# Altium PCB TestAdapterBoard_01.PcbDoc
Units mm, origin at the board's own origin, x right, y up, seen from the top; angles counter-clockwise.
Board outline 57.5 x 55 mm, 2 copper layers (Top Layer, Bottom Layer), stack 1.036 mm thick; 17 components, 16 nets, 110 pads, 93 vias.
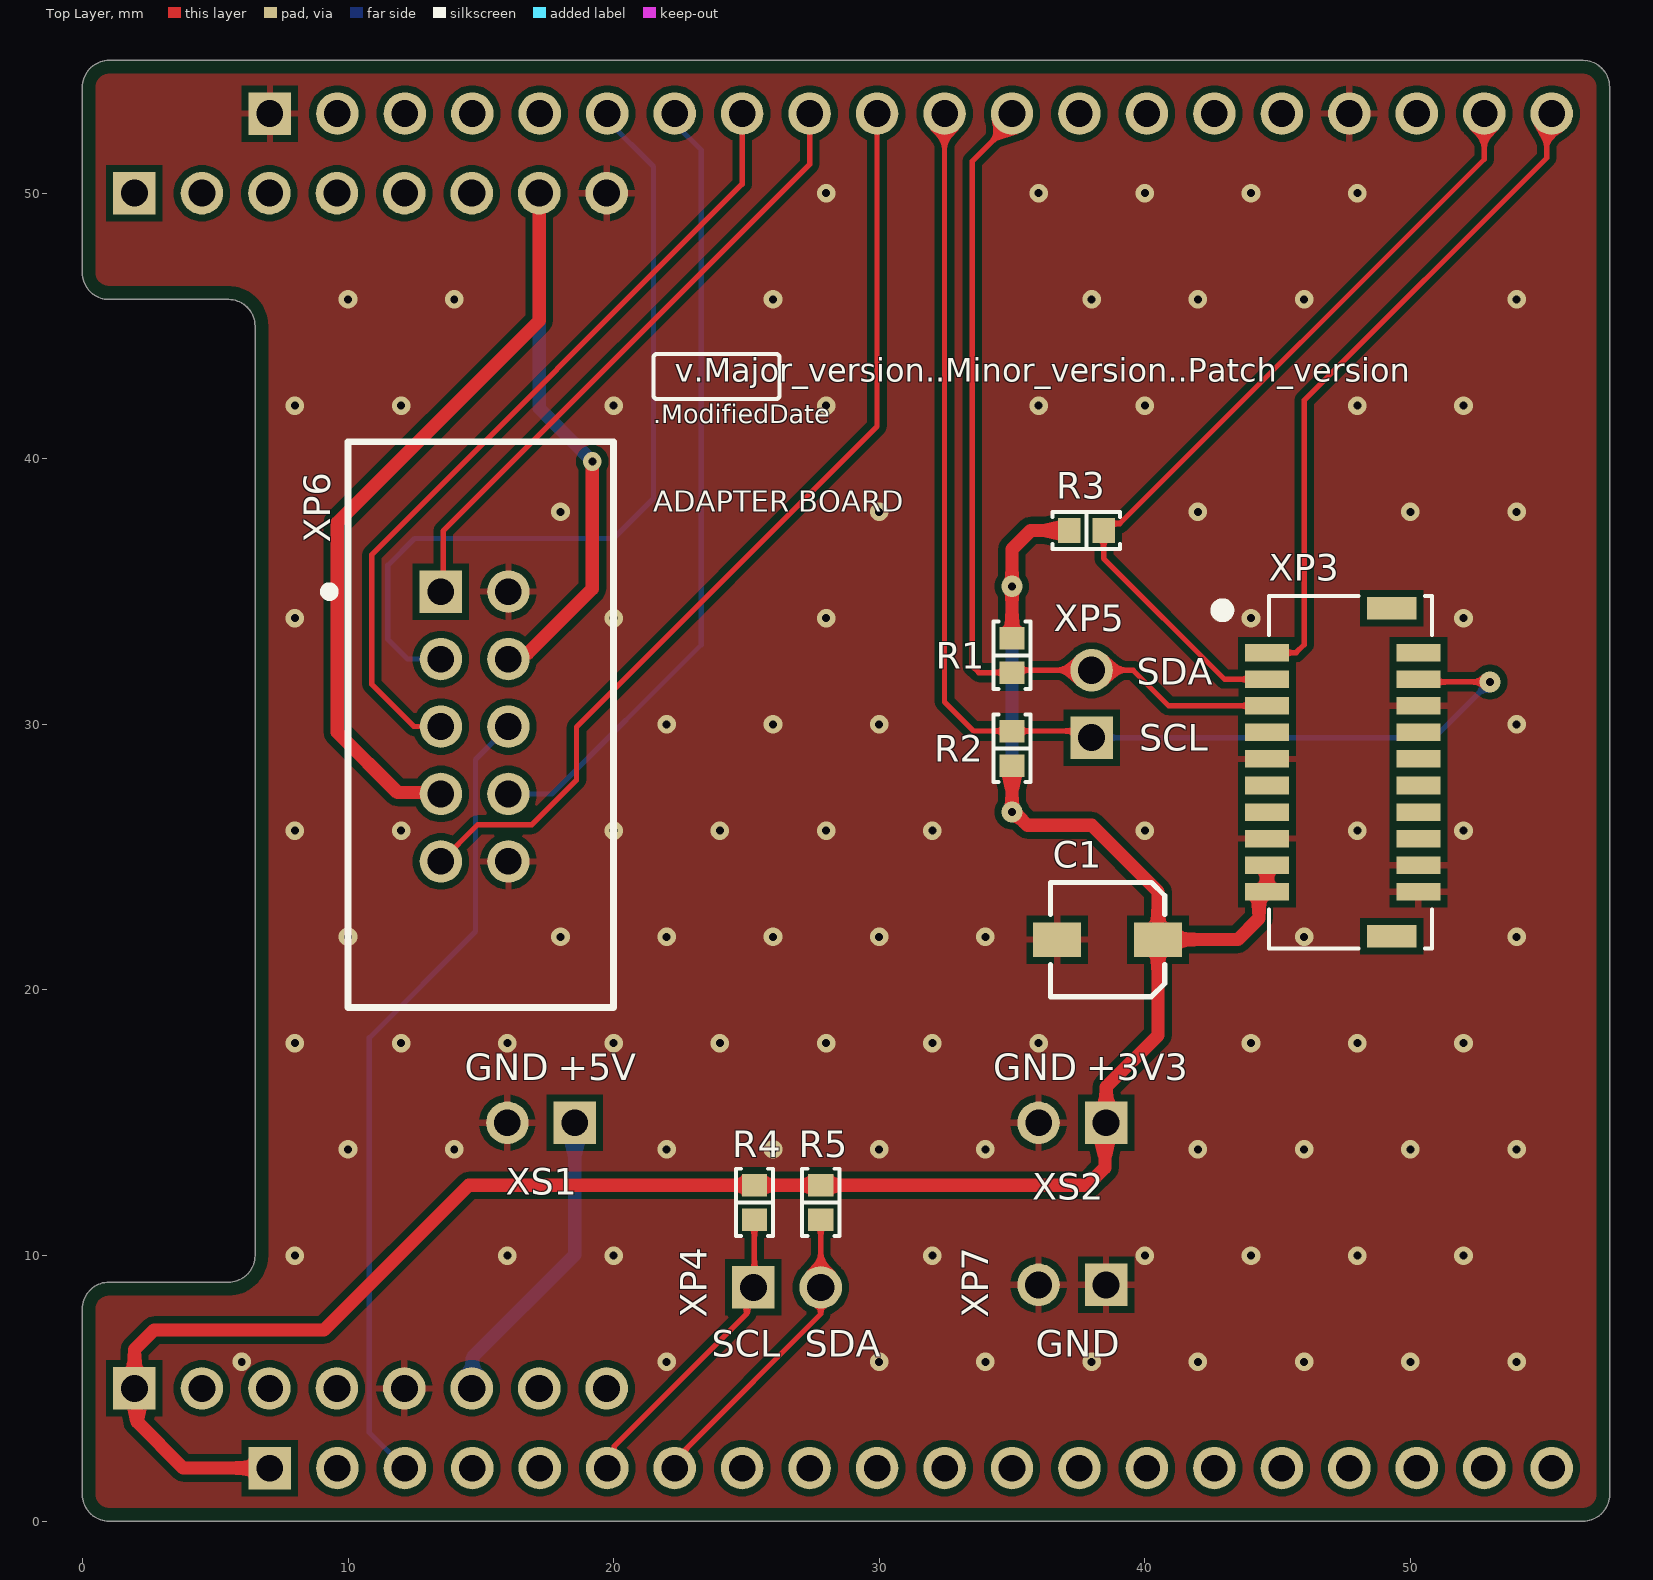
[diagram p0: Top Layer view]
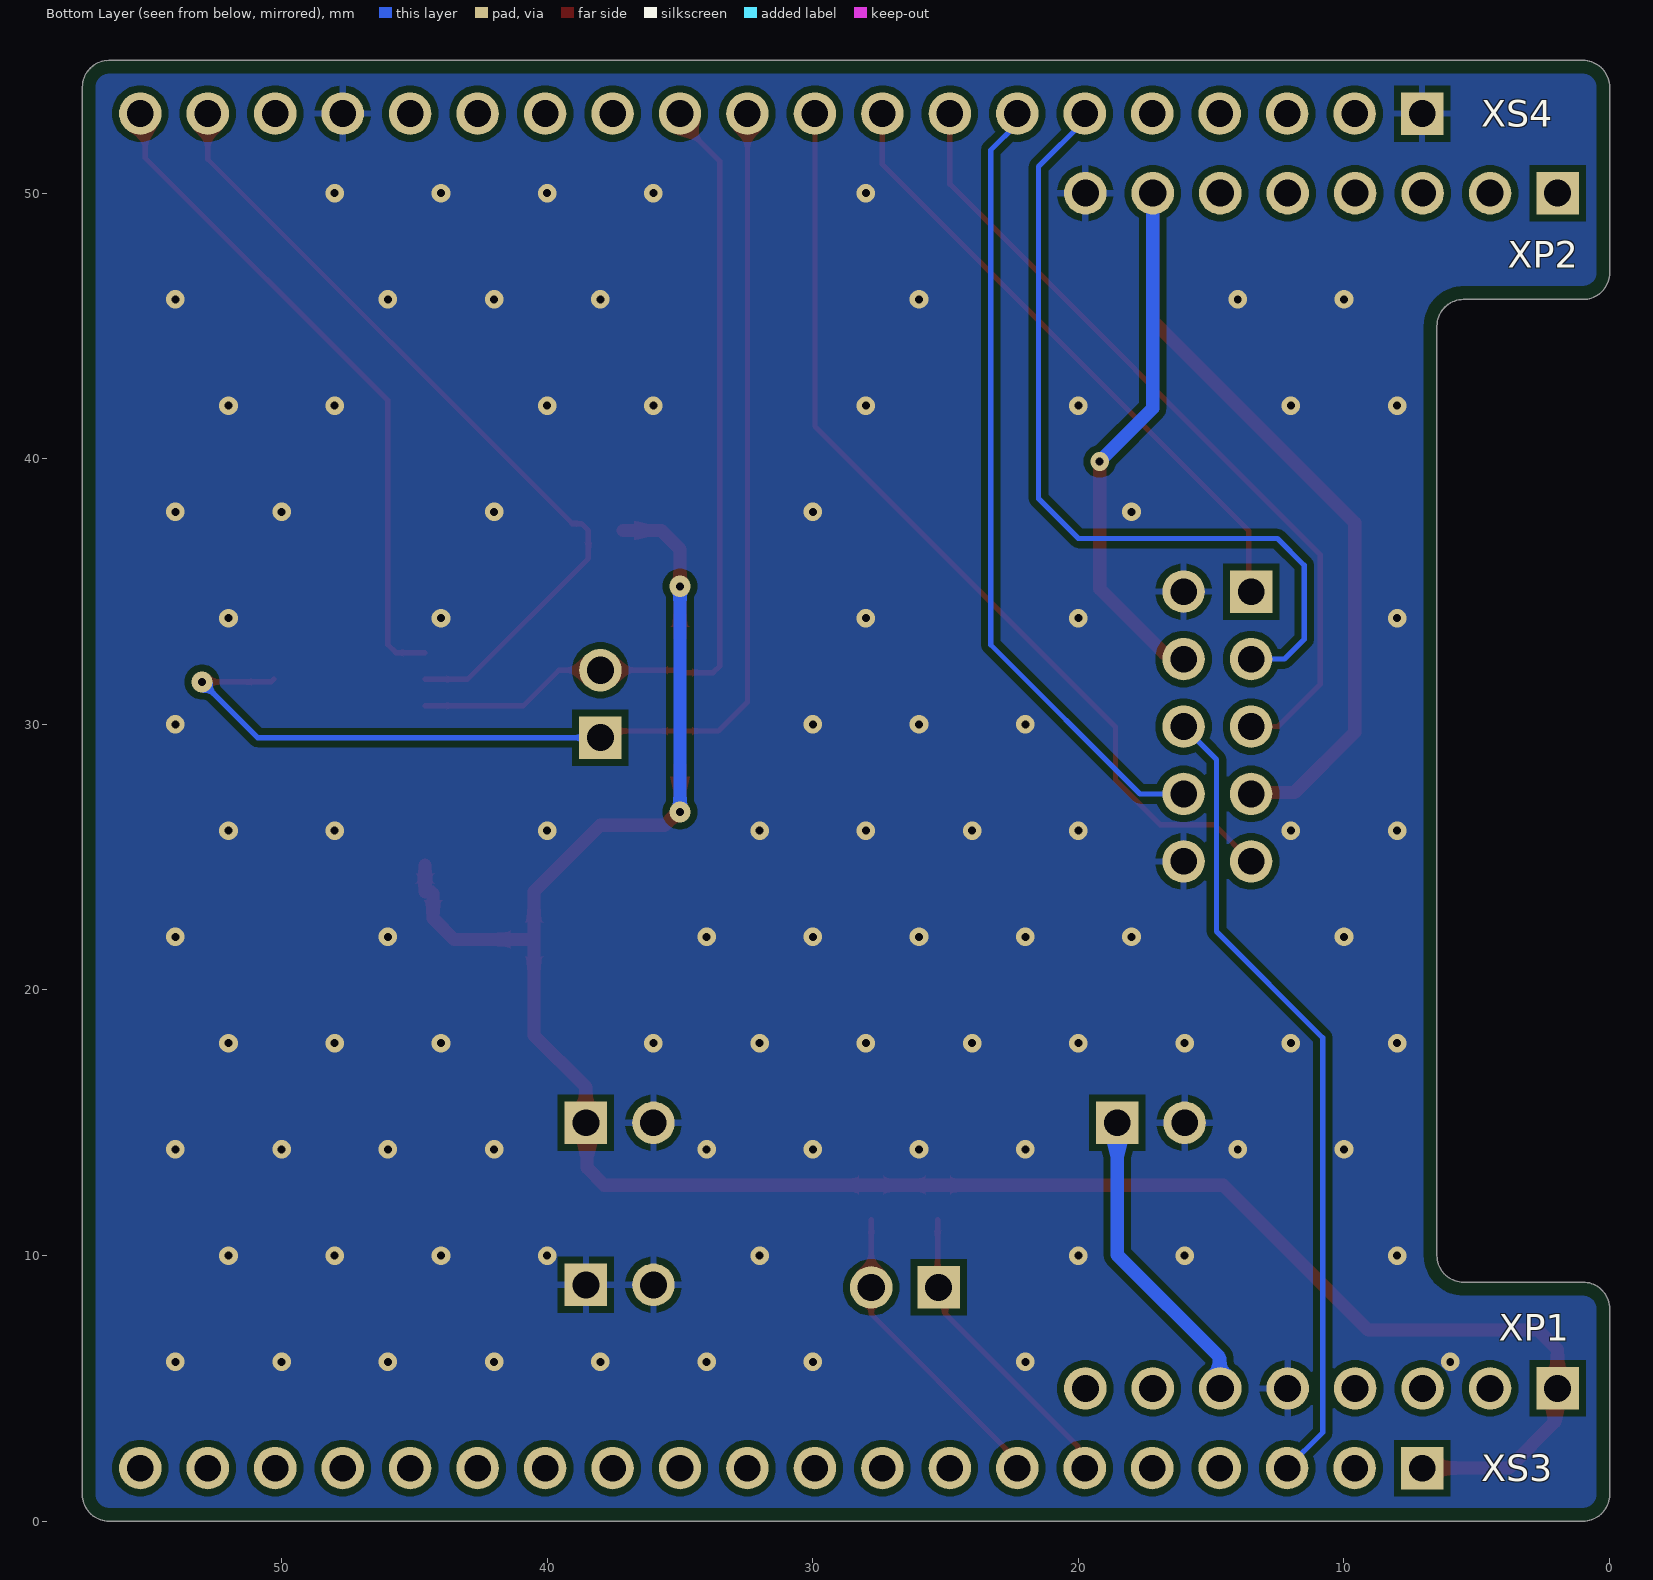
[diagram p1: Bottom Layer view, seen from below]
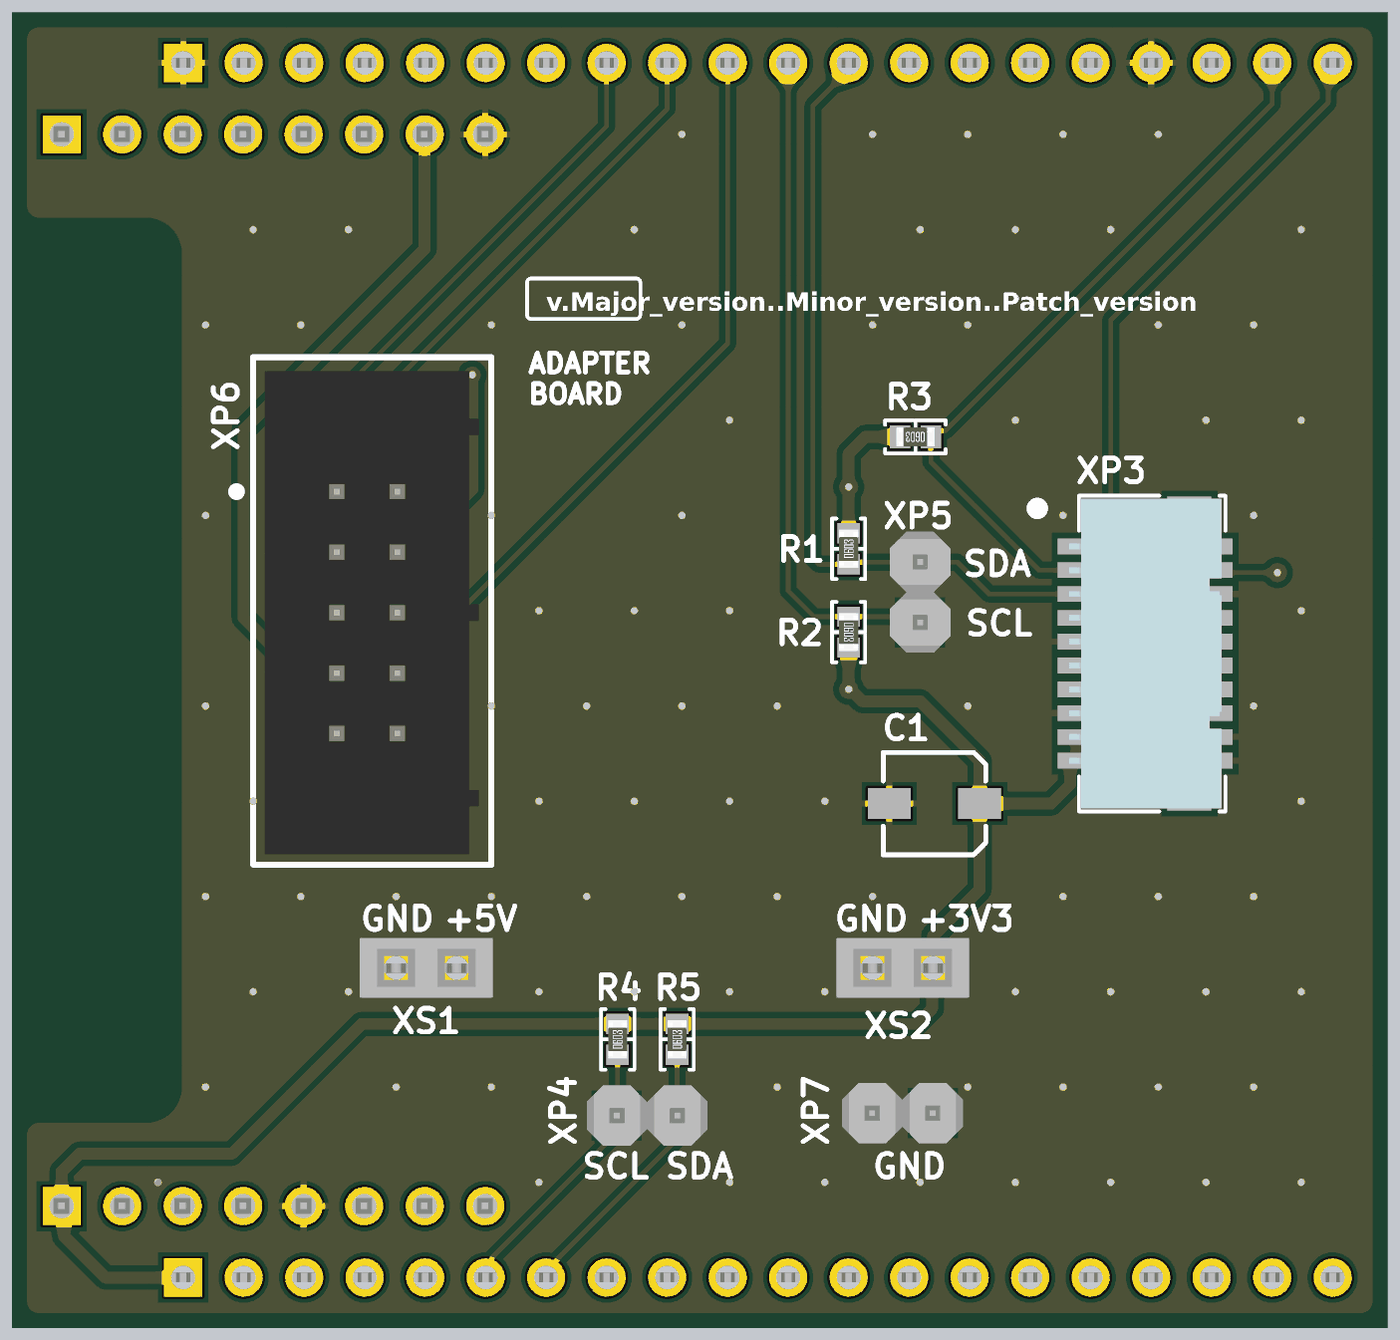
[diagram p2: 3D render of the assembled board from above, using the file's embedded part models]
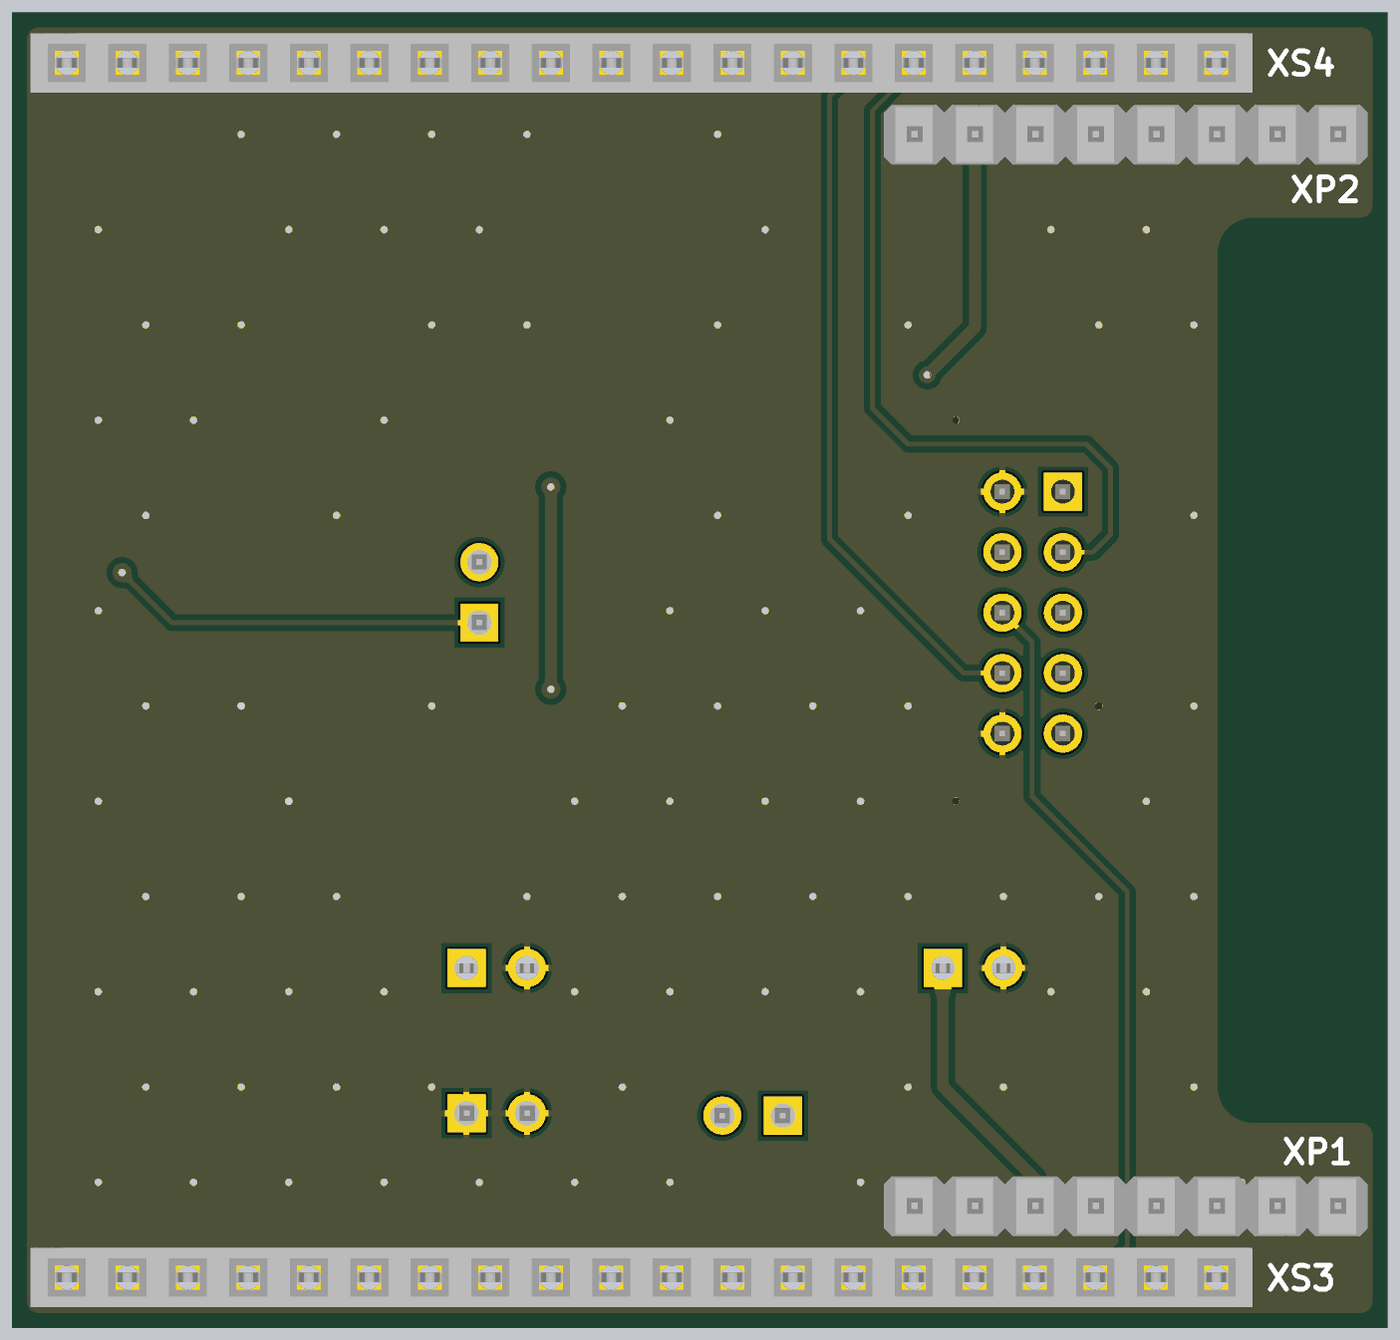
[diagram p3: 3D render of the assembled board from below, using the file's embedded part models]

## Layer stack, top to bottom
Top Solder: solder mask 0.0102, Solder Resist, Dk 3.5
Top Layer: signal copper 0.018
Dielectric 1: core 1, FR4, Dk 4.6
Bottom Layer: signal copper 0.018
Bottom Solder: solder mask 0.0102, Solder Resist, Dk 3.5

## Board outline
0,1 ccw(c1,1) 1,0 56.5,0 ccw(c56.5,1) 57.5,1 57.5,54 ccw(c56.5,54) 56.5,55 1,55 ccw(c1,54) 0,54 0,47 ccw(c1,47) 1,46 5.5,46 cw(c5.5,45) 6.5,45 6.5,10 cw(c5.5,10) 5.5,9 1,9 ccw(c1,8) 0,8

## Design rules (kind name [scope] priority, off if disabled: settings)
BoardOutlineClearance [All] p1: gap=0.5 ignorepadtopadclearanceinfootprint=FALSE
Clearance [All] p1: gap=0.254 ignorepadtopadclearanceinfootprint=FALSE
HoleSize [All] p1: absolutevalues=TRUE maxlimit=5 minlimit=0.2 maxpercent=80.000 minpercent=20.000
MinimumAnnularRing [All] p1: minimumring=0.2
MinimumSolderMaskSliver [All] p1: minsoldermaskwidth=0.15
PolygonConnect [All] p1: thpad.connectstyle=Relief thpad.reliefconductorwidth=0.254 thpad.reliefentries=4 thpad.polygonreliefangle="90 Angle" thpad.airgapwidth=0.254 smdpad.connectstyle=Relief smdpad.reliefconductorwidth=0.254 smdpad.reliefentries=4 smdpad.polygonreliefangle="90 Angle" smdpad.airgapwidth=0.254 via.connectstyle=Direct via.reliefconductorwidth=0.254 via.reliefentries=4 via.polygonreliefangle="90 Angle" via.airgapwidth=0.254
RoutingVias [All] p1: holewidth=0.3 width=0.7 viastyle="Through Hole" minholewidth=0.2 minwidth=0.4 maxholewidth=1 maxwidth=2
SilkToSilkClearance [All] p1: silktosilkclearance=0.15
SilkToSolderMaskClearance [IsPad] p1: minsilkscreentomaskgap=0.1 clearancetoexposedcopper=TRUE
SolderMaskExpansion [All] p1: expansion=0.102 istentingtop=FALSE
SupplyNets "Schematic Supply Nets_3" [InNet('GND')] p1: voltage=0.000
SupplyNets "Schematic Supply Nets_2" [InNet('+5V')] p2: voltage=0.000
SupplyNets "Schematic Supply Nets_1" [InNet('+3V3')] p3: voltage=0.000
SupplyNets "Schematic Supply Nets" [InNet('+3.3V')] p4: voltage=0.000
Width [All] p1: maxlimit=1 minlimit=0.1 preferedwidth=0.2
26 further rules are at their usual default settings.

## Components (designator, comment, footprint, x,y, rotation, side; value= is the part's Value field where it differs from the comment)
C1 "10uF" "CAP ALSMD ELEC 4.3MM H5.4MM" 38.6,21.9 r180 top
R1 "4.7k" "RES 0603_1608" 35,32.6 r90 top
R2 "4.7k" "RES 0603_1608" 35,29.1 r270 top
R3 "10k" "RES 0603_1608" 37.8,37.3 r180 top
R4 "4.7k" "RES 0603_1608" 25.3,12 r90 top
R5 "4.7k" "RES 0603_1608" 27.8,12 r90 top
XP1 "DS1021-1x8S" DS1021-1x8S 1.96,5 r0 bottom
XP2 "DS1021-1x8S" DS1021-1x8S 1.96,50 r0 bottom
XP3 "Molex 5015712007" "Molex 5015712007" 47.746,28.2 r90 top
XP4 "DS1021-1x2S" DS1021-1x2S 25.26,8.8 r0 top
XP5 "DS1021-1x2S" DS1021-1x2S 38,29.5 r90 top
XP6 "DS1013-10S" DS1013-10S 13.5,35 r90 top
XP7 "DS1021-1x2S" DS1021-1x2S 38.54,8.9 r180 top
XS1 "DS1023-1x2S" DS1023-1x2S 18.54,15 r180 top
XS2 "DS1023-1x2S" DS1023-1x2S 38.54,15 r180 top
XS3 "DS1023-1x20S" DS1023-1x20S 7.06,2 r0 bottom
XS4 "DS1023-1x20S" DS1023-1x20S 7.06,53 r0 bottom

## Footprints (in the part's own frame and the unit in brackets; to place one, negate y for a bottom-side part, rotate by r counter-clockwise, add the part's x,y. Pads: shape width x height; smd on the part's side, far side on the other; paste and mask are expansions set on the pad)
"CAP ALSMD ELEC 4.3MM H5.4MM" [mm] "Aluminum SMD Electrolytic Capacitor, 4.30mm Land Size, 4.00mm Diameter, 5.40mm Height, 4.60mm Maximum Leads Span"
  rect 1.8x1.3 smd: 1(-1.9,0) 2(1.9,0)
  silkscreen extent -2.15,-2.15 2.15,2.15, body extent -2.3,-2.15 2.3,2.15, height 5.4
DS1013-10S [mm]
  rect 1.6x1.6 hole 1: 1(0,0)
  round 1.6 hole 1: 2(0,-2.54) 3(-2.54,0) 4(-2.54,-2.54) 5(-5.08,0) 6(-5.08,-2.54) 7(-7.62,0) 8(-7.62,-2.54) 9(-10.16,0) 10(-10.16,-2.54)
  silkscreen extent -15.66,-6.5 5.64,4.35, body extent -15.23,-5.98 5.07,3.02, height 8.9
DS1021-1x2S [mm]
  rect 1.6x1.6 hole 1.02: 1(0,0)
  round 1.6 hole 1.02: 2(2.54,0)
  body extent -1.26,-1.27 3.82,1.27, height 8.54
DS1021-1x8S [mm]
  rect 1.6x1.6 hole 1.02: 1(0,0)
  round 1.6 hole 1.02: 2(2.54,0) 3(5.08,0) 4(7.62,0) 5(10.16,0) 6(12.7,0) 7(15.24,0) 8(17.78,0)
  body extent -1.26,-1.26 19.06,1.28, height 9.2
DS1023-1x2S [mm]
  rect 1.6x1.6 hole 1: 1(0,0)
  round 1.6 hole 1: 2(2.54,0)
  body extent -1.52,-1.25 4.06,1.25, height 5
DS1023-1x20S [mm]
  rect 1.6x1.6 hole 1: 1(0,0)
  round 1.6 hole 1: 2(2.54,0) 3(5.08,0) 4(7.62,0) 5(10.16,0) 6(12.7,0) 7(15.24,0) 8(17.78,0) 9(20.32,0) 10(22.86,0) 11(25.4,0) 12(27.94,0) 13(30.48,0) 14(33.02,0) 15(35.56,0) 16(38.1,0) 17(40.64,0) 18(43.18,0) 19(45.72,0) 20(48.26,0)
  body extent -1.52,-1.25 49.78,1.25, height 5
"Molex 5015712007" [mil]
  rect 26x65 smd paste+0 mask+0: 1(177.17,123.86) 2(177.17,-100.54) 3(137.8,123.86) 4(137.8,-100.54) 5(98.43,123.86) 6(98.43,-100.54) 7(59.06,123.86) 8(59.06,-100.54) 9(19.68,123.86) 10(19.68,-100.54) 11(-19.68,123.86) 12(-19.68,-100.54) 13(-59.06,123.86) 14(-59.06,-100.54) 15(-98.43,123.86) 16(-98.43,-100.54) 17(-137.8,123.86) 18(-137.8,-100.54) 19(-177.17,123.86) 20(-177.17,-100.54)
  rect 33x73 smd paste+0 mask+0: 21(-243.11,-61.17) 22(243.11,-61.17)
  silkscreen extent -261,-121 261,198, body extent -256,-115 256,141, height 326
"RES 0603_1608" [mm] "Chip Resistor, 2-Leads, Body 1.60x0.80mm, IPC Medium Density"
  rect 0.85x0.95 smd: 1(-0.65,0) 2(0.65,0)
  silkscreen extent -1.27,-0.7 1.27,0.7, body extent -0.8,-0.4 0.8,0.4, height 0.45

## Part data
C1: library part "К50-97 – 25В – 10мкФ (±20) % – ЕВАЯ.673541.054ТУ", "Конденсатор К50-97 – 25В – 10мкФ (±20) % – ЕВАЯ.673541.054ТУ", Dielectric type=Electrolytic, Manufacturer="АО Элеконд", Package="SMD D4x5.4", Tolerance="± 20%", Voltage=25V, Country=Россия, Group="Конденсаторы полярные", HelpURL=https://elecond.ru/pdf/k50-97.pdf, Manufacturer Part Number="К50-97 – 25В – 10мкФ (±20) % – ЕВАЯ.673541.054ТУ", Name="К50-97 – 25В – 10мкФ (±20) % – ЕВАЯ.673541.054ТУ", Type="Конденсатор электролитический"
R1 R2 R4 R5: library part RC0603FR-074K7L, "Резистор 0603-0,1Вт-4.7кОм ± 1%", Manufacturer=Yageo, Package=SMD0603, Power=0.1W, Tolerance="± 1%", Voltage=75V, Country=Тайвань, Group=Резисторы, HelpURL=https://static.chipdip.ru/lib/175/DOC011175144.pdf, Manufacturer Part Number=RC0603FR-074K7L, Name=RC0603FR-074K7L, Type=Резистор
R3: library part RC0603FR-0710KL, "Резистор 0603-0,1Вт-10кОм ± 1%", Manufacturer=Yageo, Package=SMD0603, Power=0.1W, Tolerance="± 1%", Voltage=75V, Country=Тайвань, Group=Резисторы, HelpURL=https://static.chipdip.ru/lib/175/DOC011175144.pdf, Manufacturer Part Number=RC0603FR-0710KL, Name=RC0603FR-0710KL, Type=Резистор
XP1 XP2: "Соединитель DS1021-1x8S", Manufacturer=Connfly, Max Temperature=105°С, Min Temperature=-40°С, Nominal current=3A, Nominal Voltage=250V, Country=Китай, Group=Соединители, Manufacturer Part Number=DS1021-1x8S, Name=DS1021-1x8S, Pins number=8, Rows=1, Type="Штыри прямые"
  XP1: Net_1=+3.3V, Net_2=RST, Net_3=TX, Net_4=RX, Net_5=GND, Net_6=+5V, Net_7=INT, Net_8=ADC
  XP2: Net_1=CLK, Net_2=MISO, Net_3=MOSI, Net_4=CS, Net_5=SDA, Net_6=SCL, Net_7=+3.3V, Net_8=GND
XP3: "Соединитель Molex 5015712007", Manufacturer=Molex, Max Temperature=105°С, Min Temperature=-40°С, Nominal current=1A, Nominal Voltage=50V, Country=США, Group=Соединители, Manufacturer Part Number="Molex 5015712007", Name="Molex 5015712007", Net_1=PWR_ON, Net_2=Резерв, Net_3=PRSNT_N, Net_4=I2C_SCL, Net_5=I2C_SDA, Net_6=GND, Net_7=Резерв, Net_8=Резерв, Net_9=GND, Net_10=Резерв, Net_11=Резерв, Net_12=Резерв, Net_13=Резерв, Net_14=Резерв, Net_15=GND, Net_16=Резерв, Net_17=+3.3V, Net_18=GND, Net_19=+3.3V, Net_20=GND, Pins number=20, Rows=2, Type="Вилка угловая"
XP4 XP5 XP7: "Соединитель DS1021-1x2S", Manufacturer=Connfly, Max Temperature=105°С, Min Temperature=-40°С, Nominal current=3A, Nominal Voltage=250V, Country=Китай, Group=Соединители, Manufacturer Part Number=DS1021-1x2S, Name=DS1021-1x2S, Pins number=2, Rows=1, Type="Штыри прямые"
  XP4: Net_1=I2C1_SCL, Net_2=I2C1_SDA
  XP5: Net_1=I2C0_SCL, Net_2=I2C0_SDA
  XP7: Net_1=GND, Net_2=GND
XP6: "Соединитель DS1013-10S", Manufacturer=Connfly, Max Temperature=105°С, Min Temperature=-40°С, Nominal current=1A, Nominal Voltage=500V, Country=Китай, Group=Соединители, Manufacturer Part Number=DS1013-10S, Name=DS1013-10S, Net_1=J_TCK, Net_2=GND, Net_3=J_TDO, Net_4=+3.3В, Net_5=J_TMS, Net_6=nRST, Net_7=+3.3В, Net_8=J_TRSTn, Net_9=J_TDI, Net_10=GND, Pins number=10, Rows=2, Type="Вилка прямая"
XS1 XS2: "Соединитель DS1023-1x2S", Manufacturer=Connfly, Max Temperature=105°С, Min Temperature=-40°С, Nominal current=1A, Nominal Voltage=250V, Country=Китай, Group=Соединители, Manufacturer Part Number=DS1023-1x2S, Name=DS1023-1x2S, Net_1=+5V, Net_2=GND, Pins number=2, Rows=1, Type="Гнездо на плату"
XS3 XS4: "Соединитель DS1023-1x20S", Manufacturer=Connfly, Max Temperature=105°С, Min Temperature=-40°С, Nominal current=1A, Nominal Voltage=250V, Country=Китай, Group=Соединители, Manufacturer Part Number=DS1023-1x20S, Name=DS1023-1x20S, Pins number=20, Rows=1, Type="Гнездо на плату"
  XS3: Net_1=+3.3V, Net_2=+3.3V_B, Net_3=RST, Net_4=P1_15, Net_5=P1_14, Net_6=I2C1_SCL, Net_7=I2C1_SDA, Net_8=P1_11, Net_9=P1_10, Net_10=P1_9, Net_11=P1_8, Net_12=P1_7, Net_13=P1_6, Net_14=P1_5, Net_15=P1_4, Net_16=P1_3, Net_17=P1_2, Net_18=P1_1, Net_19=P1_0, Net_20=P2_7
  XS4: Net_1=GND, Net_2=WKP, Net_3=P2_2, Net_4=P2_1, Net_5=P2_0, Net_6=TDO, Net_7=TRST, Net_8=TMS, Net_9=TCK, Net_10=TDI, Net_11=I2C0_SCL, Net_12=I2C0_SDA, Net_13=P0_8, Net_14=P0_7, Net_15=P0_6, Net_16=+3.3V_A, Net_17=GND, Net_18=P0_5, Net_19=P0_4, Net_20=P0_3

## Via types
v1: diameter 0.7/0.7 (per signal layer), hole 0.3, Top Layer to Bottom Layer, tented both sides, 89 vias
v2: diameter 0.8, hole 0.3, Top Layer to Bottom Layer, tented both sides, 3 vias
v3: diameter 0.7, hole 0.3, Top Layer to Bottom Layer, tented both sides, 1 vias

## Nets (pads, with @x,y where several pads share a name; then routed paths per layer and width w, separated by ;. In a path a pad name is that pad's centre, name@x,y a point inside that pad or via, vN(x,y) a via of type N, cw(c..) or ccw(c..) an arc to the next point about the centre after c; other vN are vias at no path point)
+3.3V: C1.1 R1.2 R2.2 R3.2 R4.2 R5.2 XP1.1 XP3.17 XP3.19 XS2.1 XS3.1 | length 88.3
  Top Layer w0.5: XS3.1 3.8,2 2.057,3.743 2.057,4.903 XP1.1 1.96,6.46 2.7,7.2 9.1,7.2 14.55,12.65 R4.2 R5.2 37.85,12.65 38.5,13.3 38.5,14.96 38.55,15.01 38.55,16.35 40.5,18.3 C1.1 ; R2.2 v2(35,26.7) 35.081,26.7 35.581,26.2 38,26.2 40.5,23.7 C1.1 ; R1.2 v2(35,35.2) 35,36.6 35.7,37.3 R3.2 ; XP3.17 XP3.19 44.38,23.7 44.3,23.62 44.3,22.7 43.5,21.9 C1.1
  Bottom Layer w0.5: v2(35,26.7) v2(35,35.2)
+3V3: XP2.7 XP6.4 XP6.7 | length 48.3
  Top Layer w0.5: XP6.7 13.444,27.436 11.864,27.436 9.6,29.7 9.6,37.6 17.2,45.2 XP2.7 ; XP6.4 16.25,32.67 16.77,32.67 19.2,35.1 v3(19.2,39.9)
  Bottom Layer w0.5: XP2.7 17.2,41.9 v3(19.2,39.9)
+5V: XP1.6 XS1.1 | length 11.6
  Bottom Layer w0.5: XP1.6 14.685,5.025 14.685,6.167 18.54,10.022 XS1.1
GND: C1.2 XP1.5 XP2.8 XP3.6 XP3.9 XP3.15 XP3.18 XP3.20 XP6.2 XP6.10 XP7.1 XP7.2 XS1.2 XS2.2 XS4.1 XS4.17
  other v1: 6,6 22,6 30,6 34,6 38,6 42,6 46,6 50,6 54,6 8,10 16,10 20,10 32,10 40,10 44,10 48,10 52,10 10,14 14,14 22,14 26,14 30,14 34,14 42,14 46,14 50,14 54,14 8,18 12,18 16,18 20,18 24,18 28,18 32,18 36,18 44,18 48,18 52,18 10,22 18,22 22,22 26,22 30,22 34,22 46,22 54,22 8,26 12,26 20,26 24,26 28,26 32,26 40,26 48,26 52,26 22,30 26,30 30,30 54,30 8,34 20,34 28,34 44,34 52,34 18,38 30,38 42,38 50,38 54,38 8,42 12,42 20,42 28,42 36,42 40,42 48,42 52,42 10,46 14,46 26,46 38,46 42,46 46,46 54,46 28,50 36,50 40,50 44,50 48,50
I2C0_SCL: R2.1 XP3.4 XP5.1 XS4.11 | length 46.9
  Top Layer w0.2: XS4.11 32.46,30.84 33.55,29.75 37.75,29.75 XP5.1 ; XP3.4 50.4,31.6 v2(53,31.6)
  Bottom Layer w0.2: XP5.1 50.9,29.5 v2(53,31.6)
I2C0_SDA: R1.1 XP3.5 XP5.2 XS4.12 | length 33.2
  Top Layer w0.2: XS4.12 35,52.7 33.5,51.2 33.5,32.2 33.75,31.95 R1.1 35.09,32.04 XP5.2 39.56,32.04 40.9,30.7 XP3.5
I2C1_SCL: R4.1 XP4.1 XS3.6 | length 11.6
  Top Layer w0.2: XS3.6 20.028,2.268 20.028,2.828 25.017,7.817 25.017,8.557 25.3,8.84 R4.1
I2C1_SDA: R5.1 XP4.2 XS3.7 | length 11.6
  Top Layer w0.2: XS3.7 22.3,2.279 22.778,2.757 22.778,2.778 27.8,7.8 XP4.2 R5.1
JTAG_TCK: XP6.1 XS4.9 | length 23.7
  Top Layer w0.2: XP6.1 13.583,35.083 13.583,37.283 27.38,51.08 XS4.9
JTAG_TDI: XP6.9 XS4.10 | length 36.2
  Top Layer w0.2: XP6.9 14.886,26.226 16.926,26.226 18.6,27.9 18.6,29.9 29.92,41.22 XS4.10
JTAG_TDO: XP6.3 XS4.6 | length 31.4
  Bottom Layer w0.2: XP6.3 12.24,32.46 11.5,33.2 11.5,35.992 12.508,37 20,37 21.5,38.5 21.5,51 19.76,52.74 XS4.6
JTAG_TMS: XP6.5 XS4.8 | length 30.5
  Top Layer w0.2: XP6.5 12.48,29.92 10.9,31.5 10.9,36.4 24.84,50.34 XS4.8
JTAG_TRSTn: XP6.8 XS4.7 | length 30
  Bottom Layer w0.2: XP6.8 17.68,27.38 23.3,33 23.3,51.621 22.3,52.621 XS4.7
nRST: XP6.6 XS3.3 | length 30.6
  Bottom Layer w0.2: XS3.3 10.8,3.34 10.8,18.2 14.8,22.2 14.8,28.68 XP6.6
PRSNT_N: R3.1 XP3.3 XS4.19 | length 30.9
  Top Layer w0.2: XP3.3 43,31.7 38.45,36.25 R3.1 38.708,37.558 39.058,37.558 52.78,51.28 XS4.19
PWR_ON: XP3.1 XS4.20 | length 25.4
  Top Layer w0.2: XP3.1 45.7,32.7 46,33 46,42.2 55.132,51.332 55.132,52.812 XS4.20
pads on no net: XP1.2 XP1.3 XP1.4 XP1.7 XP1.8 XP2.1 XP2.2 XP2.3 XP2.4 XP2.5 XP2.6 XP3.2 XP3.7 XP3.8 XP3.10 XP3.11 XP3.12 XP3.13 XP3.14 XP3.16 XP3.21 XP3.22 XS3.2 XS3.4 XS3.5 XS3.8 XS3.9 XS3.10 XS3.11 XS3.12 XS3.13 XS3.14 XS3.15 XS3.16 XS3.17 XS3.18 XS3.19 XS3.20 XS4.2 XS4.3 XS4.4 XS4.5 XS4.13 XS4.14 XS4.15 XS4.16 XS4.18

## Polygon pours and split planes (outlines as drawn)
GND on Bottom Layer "GND_L02_P000" (solid, pour order 0): 0,55 0,0 58.5,0 58.5,55
GND on Top Layer "GND_L01_P001" (solid, pour order 1): 0,55 0,0 58.5,0 58.5,55

## Silkscreen, mask and mechanical layers (free items; w line width, h text height)
Top Overlay:
  lines w0.15: 21.5,42.4 ccw(c21.65,42.4) 21.65,42.25 26.101,42.25 ccw(c26.101,42.4) 26.251,42.4 26.251,43.801 ccw(c26.101,43.801) 26.101,43.951 21.65,43.951 ccw(c21.65,43.801) 21.5,43.801 21.5,42.4
  text "v.Major_version..Minor_version..Patch_version" at 22.3,42.6 h1.5
  text ".ModifiedDate" at 21.5,41.1 h1.2
  text "ADAPTER BOARD" at 21.5,38 h0.8
  text "SDA" at 39.7,31.5 h1
  text "SCL" at 39.8,29 h1
  text "GND" at 14.4,16.6 h1
  text "+5V" at 17.9,16.6 h1
  text "GND" at 34.3,16.6 h1
  text "+3V3" at 37.8,16.6 h1
  text "SCL" at 23.7,6.2 h1
  text "SDA" at 27.2,6.2 h1
  text "GND" at 35.9,6.2 h1
Board:
  the board outline again, w0.254